# Altium PCB Dual_P_Variable_Power_Supply.PcbDoc
Units mm, origin at the board's own origin, x right, y up, seen from the top; angles counter-clockwise.
Board outline 110 x 90 mm, 2 copper layers (Top Layer, Bottom Layer); 36 components, 15 nets, 80 pads, 0 vias.
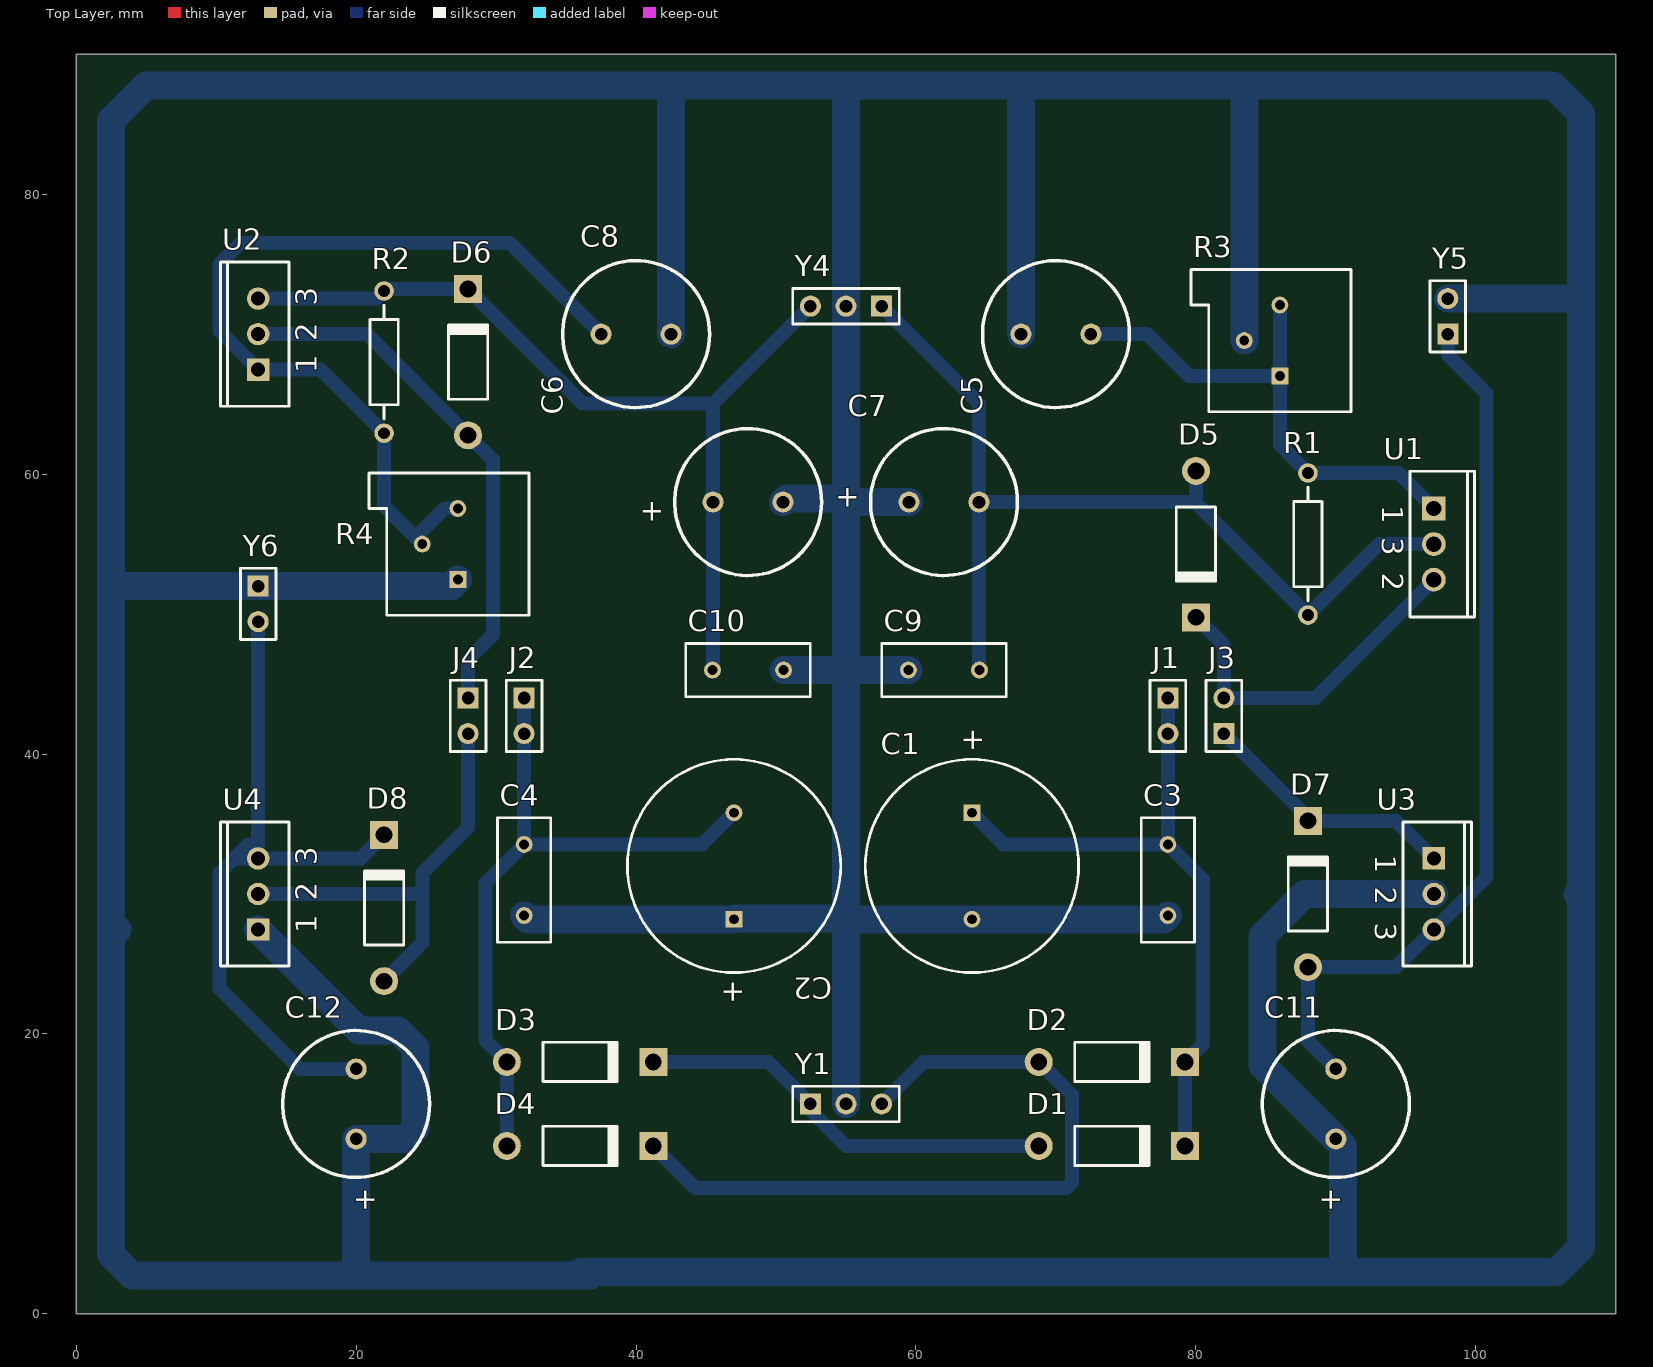
[diagram p0: Top Layer view]
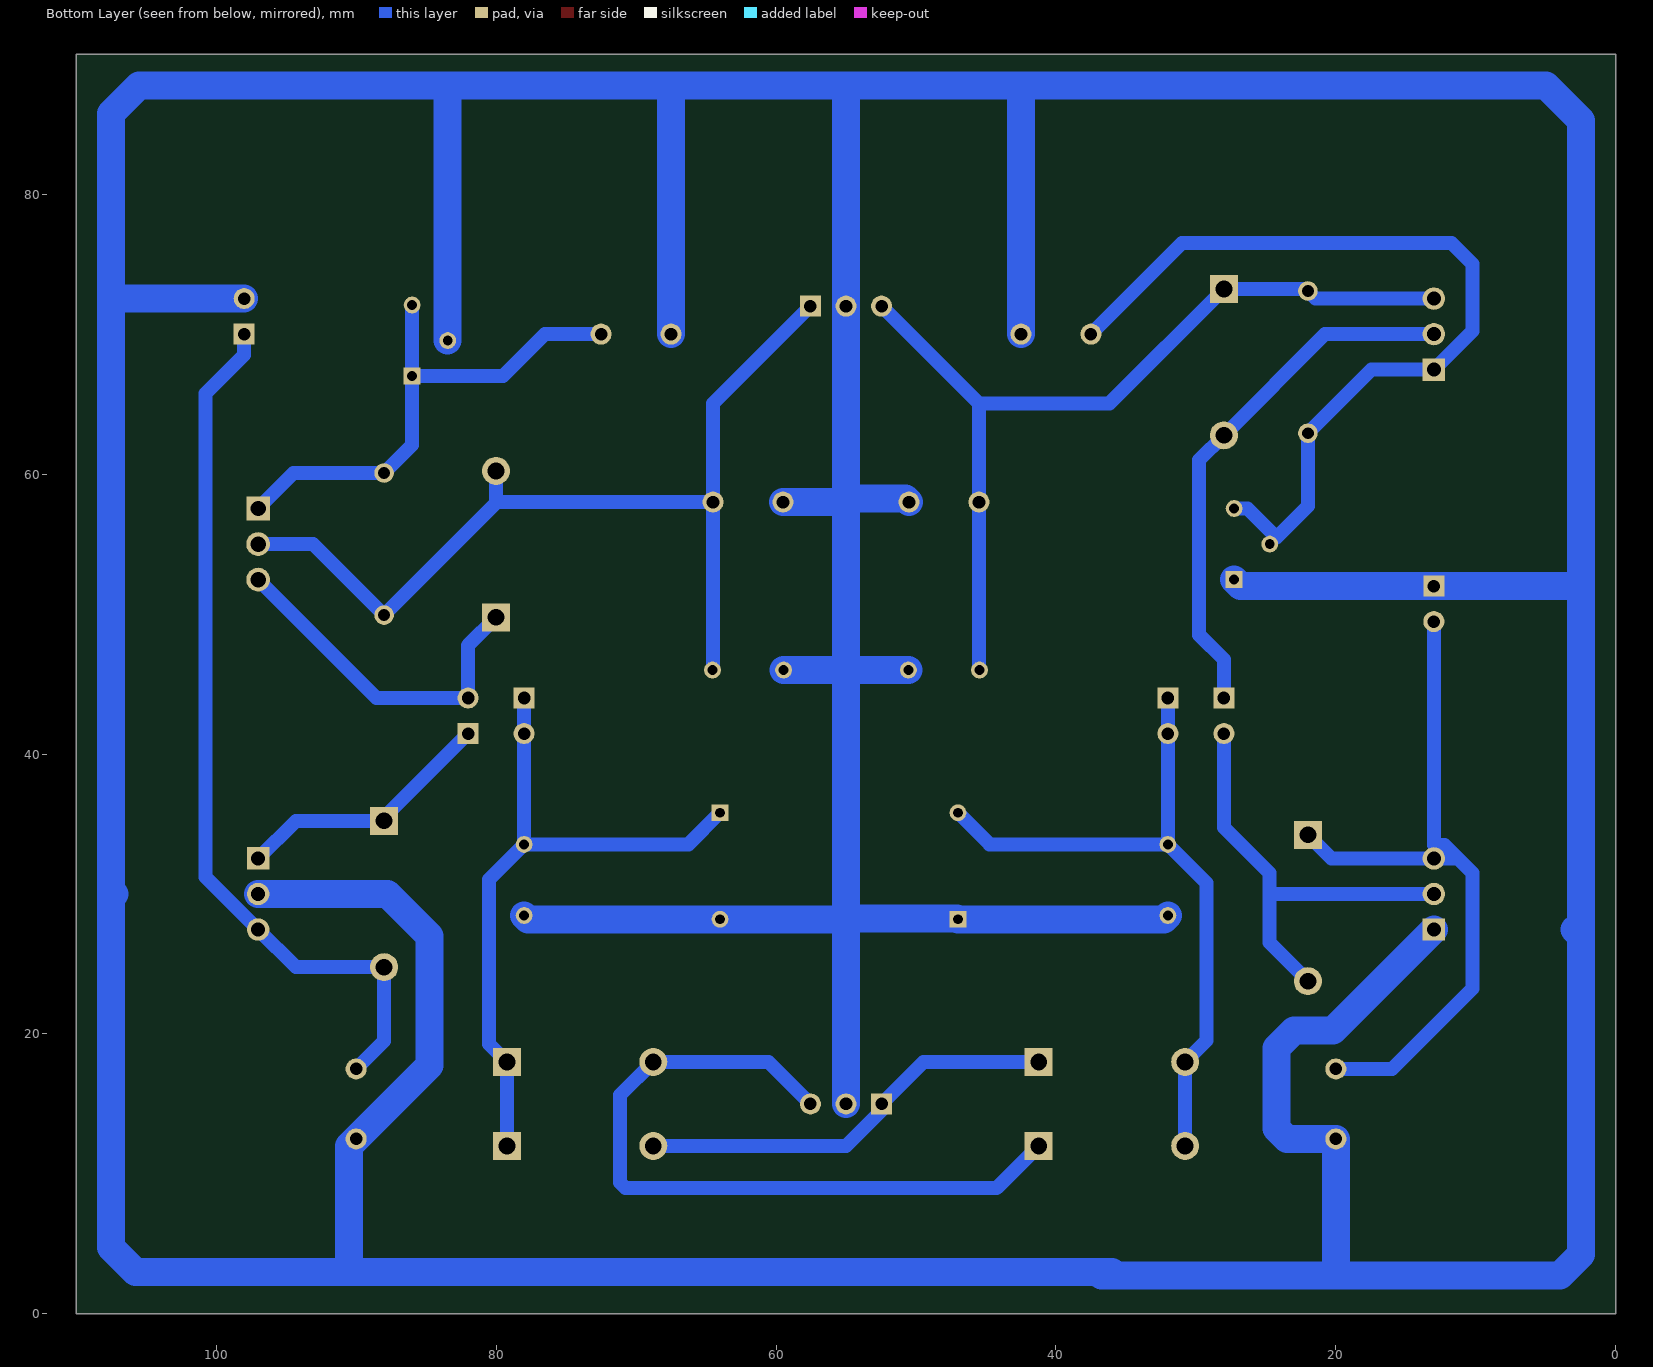
[diagram p1: Bottom Layer view, seen from below]

## Layer stack, top to bottom
Top Solder: solder mask 0.0102, Solder Resist, Dk 3.5
Top Layer: signal copper 0.0356
Dielectric1: dielectric 0.32, FR-4, Dk 4.8
Bottom Layer: signal copper 0.0356
Bottom Solder: solder mask 0.0102, Solder Resist, Dk 3.5

## Board outline
0,0 0,90 110,90 110,0

## Design rules (kind name [scope] priority, off if disabled: settings)
AssemblyTestPointUsage [All] p1: valid=2
Clearance [All] p1: gap=0.25
FabricationTestPointUsage TestPointUsage [All] p1: valid=2 allowmultiple=FALSE
FabricationTestpoint Testpoint [All] p1: side=3 testpointundercomponent=TRUE minsize=1.016 maxsize=2.54 preferedsize=1.524 minholesize=0 maxholesize=1.016 preferedholesize=0.813 testpointgrid=0.025 allowsidetop=TRUE allowsidebottom=TRUE usegrid=TRUE gridtolerance=0
PolygonConnect [All] p1: connectstyle=Relief reliefconductorwidth=0.254 reliefentries=4 polygonreliefangle="90 Angle" airgapwidth=0.254
RoutingVias [All] p1: holewidth=0.711 width=1.27 viastyle="Through Hole" minholewidth=0.711 minwidth=1.27 maxholewidth=0.711 maxwidth=1.27
SilkToSolderMaskClearance SilkscreenOverComponentPads [IsPad] p1: minsilkscreentomaskgap=0.125 clearancetoexposedcopper=TRUE
SolderMaskExpansion [All] p1: expansion=0.102
Width Width_GND [InNet('GND')] p1: maxlimit=2.5 minlimit=1 preferedwidth=2
Width [All] p2: maxlimit=1 minlimit=0.5 preferedwidth=1
26 further rules are at their usual default settings.

## Components (designator, comment, footprint, x,y, rotation, side; value= is the part's Value field where it differs from the comment)
C1 "2200uF" RB7.6-15 64,32 r90 top
C2 "2200uF" RB7.6-15 47,32 r270 top
C3 "0.1uF" RAD-0.2 78,31 r90 top
C4 "0.1uF" RAD-0.2 32,31 r270 top
C5 "10uF" RB5-10.5 70,70 r180 top
C6 "10uF" RB5-10.5 40,70 r0 top
C7 "470uF" RB5-10.5 62,58 r180 top
C8 "470uF" RB5-10.5 48,58 r180 top
C9 "0.1uF" RAD-0.2 62,46 r0 top
C10 "0.1uF" RAD-0.2 48,46 r0 top
C11 "0.1uF" RB5-10.5 90,15 r270 top
C12 "0.1uF" RB5-10.5 20,15 r270 top
D1 "1N4003" DO-41 74,12 r0 top
D2 "1N4003" DO-41 74,18 r0 top
D3 "1N4003" DO-41 36,18 r0 top
D4 "1N4003" DO-41 36,12 r0 top
D5 "1N4003" DO-41 80,55 r270 top
D6 "1N4003" DO-41 28,68 r90 top
D7 "Diode 1N4003" DO-41 88,30 r90 top
D8 "Diode 1N4003" DO-41 22,29 r90 top
J1 "Header 2" HDR1X2 78,44 r270 top (schematic designator P1)
J2 "Header 2" HDR1X2 32,44 r270 top (schematic designator P2)
J3 "Header 2" HDR1X2 82,41.46 r90 top (schematic designator P3)
J4 "Header 2" HDR1X2 28,44 r270 top (schematic designator P4)
R1 "220" AXIAL-0.4 88,55 r270 top
R2 "220" AXIAL-0.4 22,68 r270 top
R3 "5K" VR4 84.73,69.54 r90 top
R4 "5K" VR4 26,55 r90 top
U1 "LM317T" TO220ABN 97,55 r270 top
U2 "LM337T" 221A-04 13,70 r90 top
U3 "MC7805CT" 221A-04 97,30 r270 top
U4 "MC7905CT" 221A-04 13,30 r90 top
Y1 "Header 3" HDR1X3 52.46,15 r0 top
Y4 "Header 3" HDR1X3 57.54,72 r180 top
Y5 "Header 2" HDR1X2 98,70 r90 top
Y6 "Header 2" HDR1X2 13,52 r270 top

## Footprints (in the part's own frame and the unit in brackets; to place one, negate y for a bottom-side part, rotate by r counter-clockwise, add the part's x,y. Pads: shape width x height; smd on the part's side, far side on the other; paste and mask are expansions set on the pad)
221A-04 [mm] "TO, Thru-Hole, Vertical, Heatsink Mounted; 3 In-Line Leads; Pitch 2.54 mm"
  rect 1.6x1.6 hole 1: 1(-2.54,0)
  round 1.6 hole 1: 2(0,0) 3(2.54,0)
  silkscreen extent -5.15,-2.2 5.15,2.7
AXIAL-0.4 [mm] "Axial Device, Thru-Hole; 2 Leads; 0.4 in Pin Spacing"
  round 1.4 hole 0.85: 1(-5.08,0) 2(5.08,0)
  silkscreen extent -4.06,-1.02 4.06,1.02
DO-41 [mm] "Diode, Axial; Body 5.2 x 2.7 mm (LxDia. max), Lead Dia. 0.86 mm (max)"
  round 2 hole 1.2: 1(-5.23,0)
  rect 2x2 hole 1.2: 2(5.23,0)
  silkscreen extent -2.65,-1.4 2.75,1.4
HDR1X2 [mm] "Connector; Header; 2 Position"
  rect 1.5x1.5 hole 0.9: 1(0,0)
  round 1.5 hole 0.9: 2(2.54,0)
  silkscreen extent -1.27,-1.27 3.81,1.27
HDR1X3 [mm] "Connector; Header; 3 Position"
  rect 1.5x1.5 hole 0.9: 1(0,0)
  round 1.5 hole 0.9: 2(2.54,0) 3(5.08,0)
  silkscreen extent -1.27,-1.27 6.35,1.27
RAD-0.2 [mm] "Radial Cap, Thru-Hole; 2 Leads; 0.2 in Pin Spacing"
  round 1.2 hole 0.7: 1(-2.54,0) 2(2.54,0)
  silkscreen extent -4.45,-1.91 4.44,1.9
RB5-10.5 [mm] "Capacitor (Radial); 2 Leads"
  round 1.5 hole 0.9: 1(-2.5,0) 2(2.5,0)
  silkscreen extent -5.25,-5.25 5.25,5.25
RB7.6-15 [mm] "Polarized Capacitor (Radial); 2 Leads"
  rect 1.2x1.2 hole 0.7: 1(3.81,0)
  round 1.2 hole 0.7: 2(-3.81,0)
  silkscreen extent -7.62,-7.62 7.62,7.62
TO220ABN [mm] "TO, Thru-Hole, Vertical, Heatsink Mounted; 3 In-Line Leads; Pitch 2.54 mm; Pin sequence 1, 3, 2"
  rect 1.7x1.7 hole 1.1: 1(-2.54,0)
  round 1.7 hole 1.1: 2(2.54,0) 3(0,0)
  silkscreen extent -5.2,-1.7 5.2,2.9
VR4 [mm] "Thru-Hole; 3 Leads"
  rect 1.2x1.2 hole 0.7: 1(-2.54,-1.27)
  round 1.2 hole 0.7: 2(0,1.27) 3(2.54,-1.27)
  silkscreen extent -5.08,-6.35 5.08,5.08

## Part data
C1 C2 C5 C6 C7 C8 C11 C12: library part "Cap Pol1", "Polarized Capacitor (Radial)"
C3 C4 C9 C10: library part Cap, "Capacitor"
D1 D2 D3 D4 D5 D6: library part "Diode 1N4003", "1 Amp General Purpose Rectifier"
D7 D8: "1 Amp General Purpose Rectifier"
J1 J2 J3 J4 Y5 Y6: "Header, 2-Pin"
R1 R2: library part Res1, "Resistor"
R3 R4: library part RPot, "Potentiometer"
U1: "1.2V to 37V Voltage Regulator"
U2: "3-Terminal Adjustable Negative Voltage Regulator"
U3: "3-Terminal Positive Fixed Voltage Regulator"
U4: "Three-Terminal Negative Fixed Voltage Regulator"
Y1 Y4: "Header, 3-Pin"

## Nets (pads, with @x,y where several pads share a name; then routed paths per layer and width w, separated by ;. In a path a pad name is that pad's centre, name@x,y a point inside that pad or via, vN(x,y) a via of type N, cw(c..) or ccw(c..) an arc to the next point about the centre after c; other vN are vias at no path point)
A: C1.1 C3.2 D1.2 D2.2 J1.1 J1.2 | length 49
  Bottom Layer w1: C1.1 66.27,33.54 C3.2 ; J1.2@78,42 J1.2 ; J1.1 J1.2 ; D1.2 D2.2 80.5,19.27 80.5,31.04 C3.2 ; C3.2 J1.2
B: C2.2 C4.1 D3.1 D4.1 J2.1 J2.2 | length 49.7
  Bottom Layer w1: D4.1 D3.1 29.25,19.52 29.25,30.79 C4.1 ; J2.1 J2.2 C4.1 ; C2.2 44.75,33.56 44.75,33.54 C4.1
GND: C1.2 C2.1 C3.1 C4.2 C5.2 C6.2 C7.2 C8.1 C9.1 C10.2 C11.2 C12.2 R3.2 R4.1 U3.2 U4.1 Y1.2 Y4.2 Y5.2 Y6.1 | length 677.3
  Bottom Layer w2: 2.96,27.46 2.5,27 ; U4.1 20.21,20.25 23,20.25 24.25,19 24.25,13.25 23.5,12.5 C12.2 20,2.75 ; R4.1 26.81,52 Y6.1 2.5,52 ; C4.2 32.27,28.19 C2.1 47.06,28.25 55,28.25 ; 36,3 90.5,3 ; 36.75,2.75 20,2.75 ; C6.2 42.5,87.75 ; C8.1 50.75,58.25 55,58.25 ; C10.2 54.75,46 ; 54.75,46 55,46 ; Y1.2 55,28.25 ; C9.1 55,46 ; C7.2 55.25,58 55,58.25 ; C5.2 67.5,87.5 67.25,87.75 ; C3.1 77.73,28.19 C1.2 55.06,28.19 55,28.25 ; R3.2 83.46,87.54 83.25,87.75 ; U3.2 87.75,30 84.75,27 84.75,17.75 C11.2 90.5,12 90.5,3 ; Y5.2 107.21,72.54 107.5,72.25 ; 107.25,30 107.5,29.75 ; 2.5,27 2.5,4.25 4,2.75 20,2.75 ; 2.5,27 2.5,52 ; 2.5,52 2.5,85.25 5,87.75 42.5,87.75 ; 42.5,87.75 55,87.75 ; 55,28.25 55,46 ; 55,46 55,58.25 ; 55,58.25 Y4.2 55,87.75 ; 55,87.75 67.25,87.75 ; 67.25,87.75 83.25,87.75 ; 83.25,87.75 105.5,87.75 107.5,85.75 107.5,72.25 ; 90.5,3 105.75,3 107.5,4.75 107.5,29.75 ; 107.5,29.75 107.5,72.25
NetC5_1: C5.1 R1.1 R3.1 R3.3 U1.1 | length 37.6
  Bottom Layer w1: C5.1 76.5,70 79.5,67 R3.1 ; R3.3 R3.1 ; U1.1 94.46,60.08 R1.1 86,62.08 R3.1
NetC6_1: C6.1 R2.2 R4.2 R4.3 U2.1 | length 62.4
  Bottom Layer w1: R4.3 26.31,57.54 24.25,55.48 22,57.73 R2.2 17.46,67.46 U2.1 10.25,70.21 10.25,75 11.75,76.5 31,76.5 C6.1
NetC7_1: C7.1 C9.2 D5.1 R1.2 U1.3 Y4.1 | length 69.2
  Bottom Layer w1: Y4.1 64.5,65.04 C7.1 ; C9.2 64.5,46.04 C7.1 ; D5.1 80,57.92 ; U1.3 93.08,55 R1.2 80,57.92 ; C7.1 79.92,58 80,57.92
NetC8_2: C8.2 C10.1 D6.2 R2.1 U2.3 Y4.3 | length 65.1
  Bottom Layer w1: U2.3 21.46,72.54 R2.1 22.15,73.23 D6.2 36.19,65.04 45.5,65.04 ; C10.1 45.5,46.04 C8.2 45.5,65.04 ; Y4.3 45.5,65.04
NetC11_1: C11.1 D7.1 U3.3 Y5.1 | length 63.4
  Bottom Layer w1: C11.1 88,19.5 D7.1 94.31,24.77 U3.3 100.75,31.21 100.75,65.75 98,68.5 Y5.1
NetC12_1: C12.1 D8.2 U4.3 Y6.2 | length 51.3
  Bottom Layer w1: Y6.2 13,33.5 12.25,33.5 11.29,32.54 ; C12.1 16,17.5 10.25,23.25 10.25,31.5 11.29,32.54 ; D8.2 20.31,32.54 U4.3 11.29,32.54
NetD5_2: D5.2 J3.2 U1.2 | length 25.1
  Bottom Layer w1: D5.2 82,47.77 J3.2 88.54,44 U1.2
NetD6_1: D6.1 J4.1 U2.2 | length 38.2
  Bottom Layer w1: U2.2 20.77,70 D6.1 29.77,61 29.77,48.52 28,46.75 J4.1
NetD7_2: D7.2 J3.1 U3.1 | length 18.8
  Bottom Layer w1: J3.1 88,35.46 D7.2 94.31,35.23 U3.1
NetD8_1: D8.1 J4.2 U4.2 | length 32
  Bottom Layer w1: U4.2 24.5,30 24.75,29.75 ; D8.1 24.75,26.52 24.75,29.75 ; J4.2 28,34.75 24.75,31.5 24.75,29.75
VIN+: D1.1 D3.2 Y1.1 | length 30.3
  Bottom Layer w1: D3.2 49.46,18 Y1.1 52.46,14.54 55,12 D1.1
VIN-: D2.1 D4.2 Y1.3 | length 53.4
  Bottom Layer w1: D4.2 44.23,9 70.75,9 71.135,9.385 71.135,15.635 D2.1 60.54,18 Y1.3

## Text inside footprints (layer, text, board x,y; h text height)
C1: Top Overlay "+" at 64.737,40.132 h1.5 r90
C2: Top Overlay "+" at 46.263,23.868 h1.5 r270
C7: Top Overlay "+" at 56,59 h1.5 r180
C8: Top Overlay "+" at 42,58 h1.5 r180
C11: Top Overlay "+" at 89,9 h1.5 r270
C12: Top Overlay "+" at 20,9 h1.5 r270
U1: Top Overlay "3" at 93.325,55.5 h1.5 r270; Top Overlay "2" at 93.325,52.96 h1.5 r270; Top Overlay "1" at 93.325,57.79 h1.5 r270
U2: Top Overlay "3" at 17.175,72.04 h1.5 r90; Top Overlay "2" at 17.175,69.5 h1.5 r90; Top Overlay "1" at 17.175,67.21 h1.5 r90
U3: Top Overlay "3" at 92.825,27.96 h1.5 r270; Top Overlay "2" at 92.825,30.5 h1.5 r270; Top Overlay "1" at 92.825,32.79 h1.5 r270
U4: Top Overlay "3" at 17.175,32.04 h1.5 r90; Top Overlay "2" at 17.175,29.5 h1.5 r90; Top Overlay "1" at 17.175,27.21 h1.5 r90